# Altium PCB PCB2.PcbDoc
Units mm, origin at the board's own origin, x right, y up, seen from the top; angles counter-clockwise.
Board outline 152.4 x 101.6 mm, 2 copper layers (Top Layer, Bottom Layer); 11 components, 16 nets, 84 pads, 0 vias.
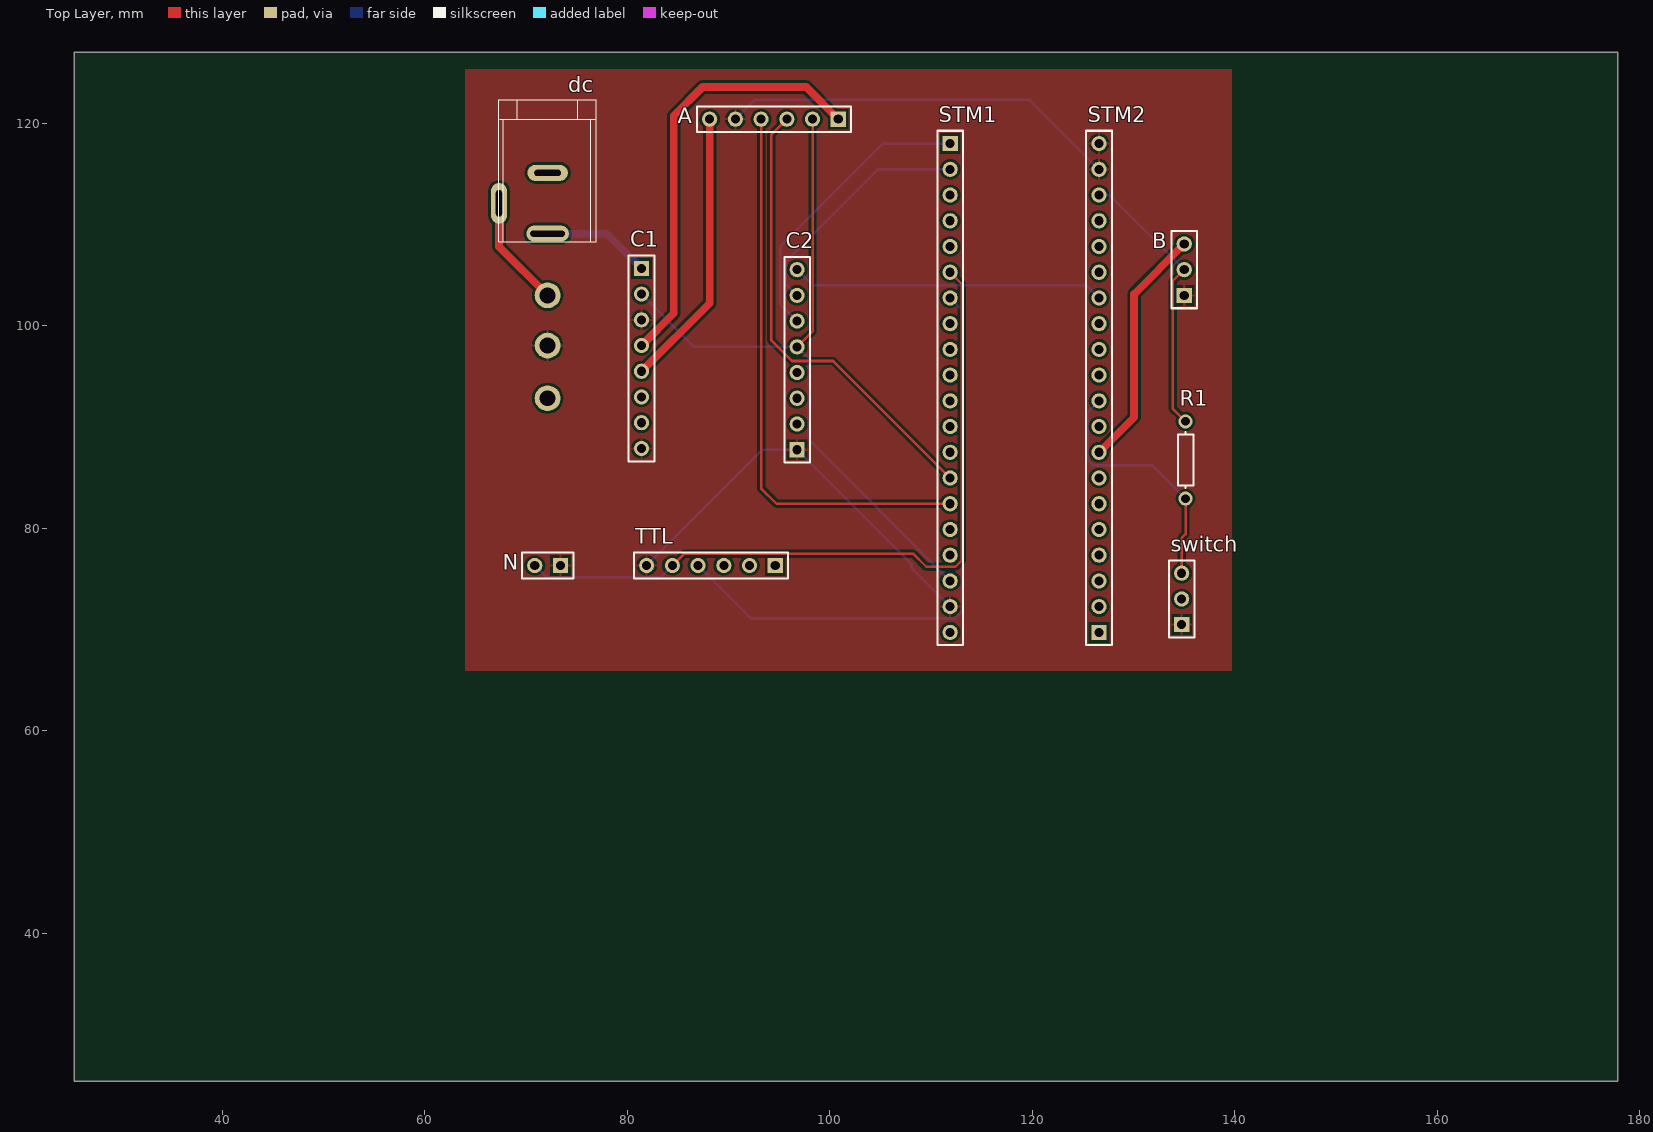
[diagram p0: Top Layer view]
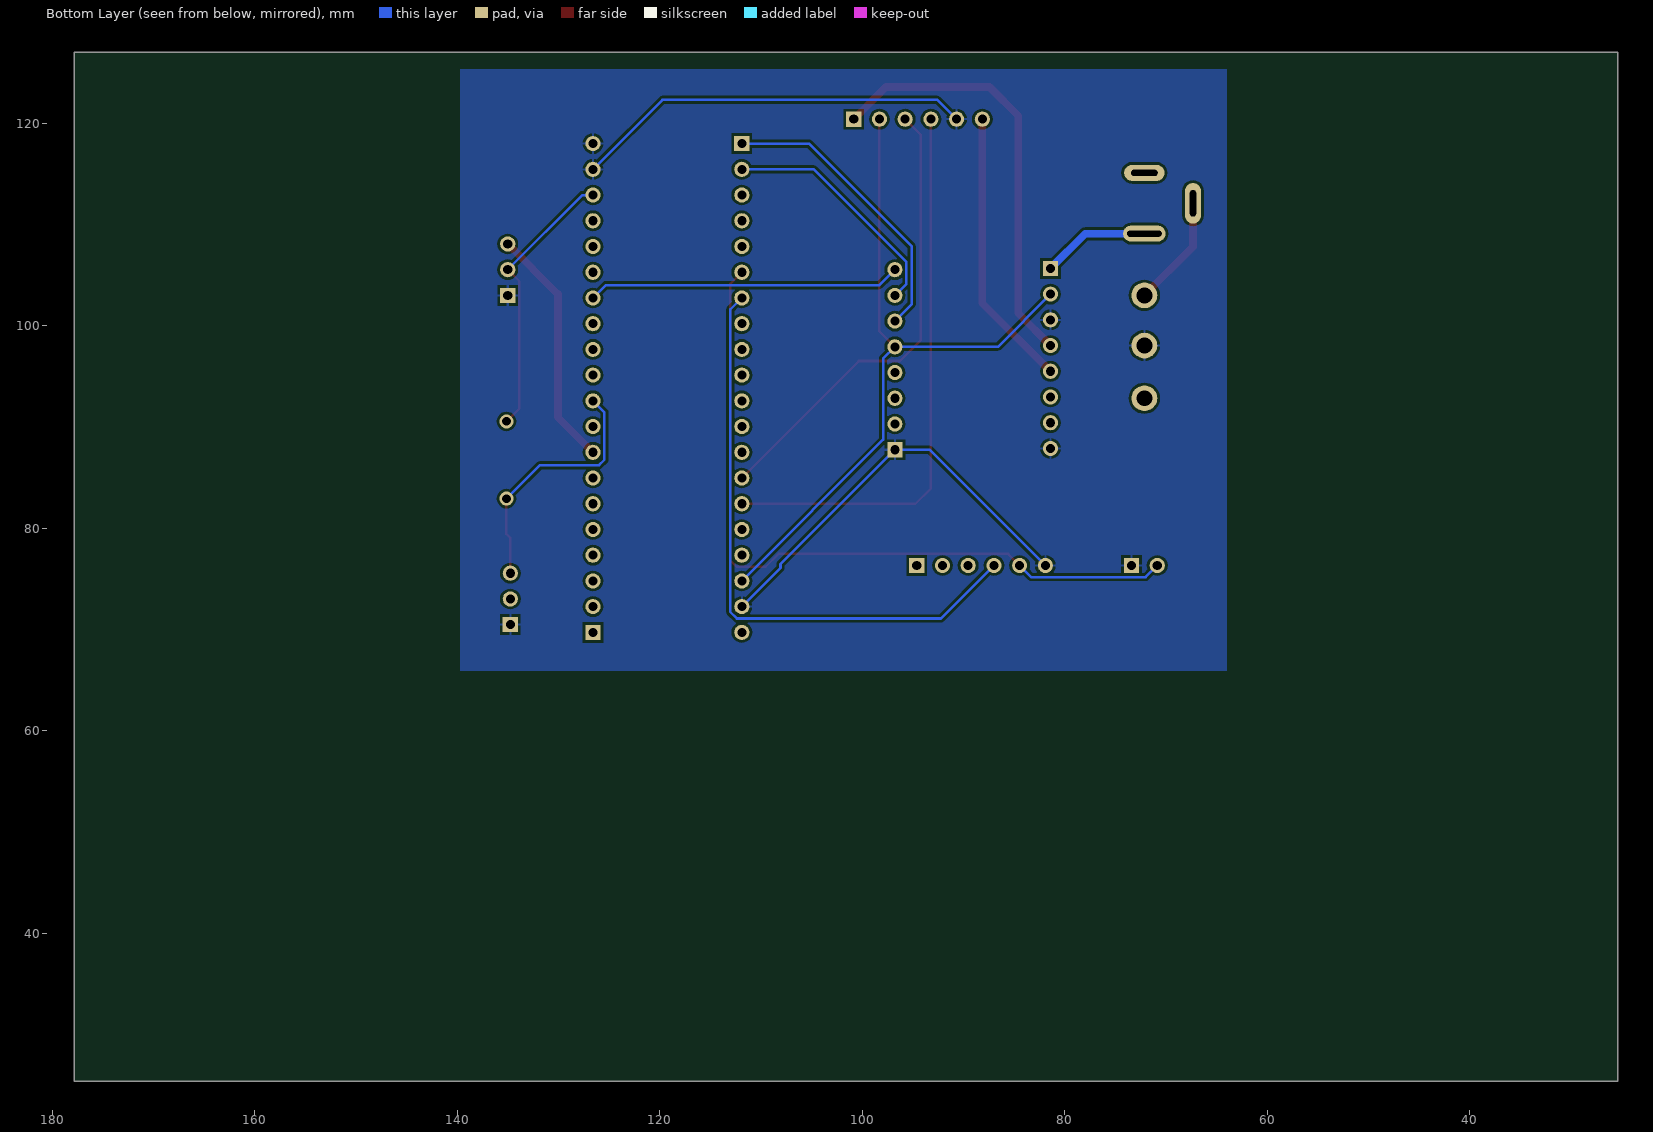
[diagram p1: Bottom Layer view, seen from below]

## Layer stack, top to bottom
Top Solder: solder mask 0.0102, Solder Resist, Dk 3.5
Top Layer: signal copper 0.0356
Dielectric 1: dielectric 0.32, FR-4, Dk 4.8
Bottom Layer: signal copper 0.0356
Bottom Solder: solder mask 0.0102, Solder Resist, Dk 3.5

## Board outline
25.4,25.4 177.8,25.4 177.8,127 25.4,127

## Design rules (kind name [scope] priority, off if disabled: settings)
Clearance [All] p1: gap=0.254 ignorepadtopadclearanceinfootprint=FALSE except(0: Arc-Hole Track-Hole SMDPad-Hole THPad-Hole Via-Hole Fill-Hole Poly-Hole Region-Hole Text-Hole)
PolygonConnect [All] p1: connectstyle=Relief reliefconductorwidth=0.254 reliefentries=4 polygonreliefangle="90 Angle" airgapwidth=0.254
RoomDefinition Sheet2 [InComponentClass('Sheet2')] p1: confinementstyle=ConfineIn formatcopy=TRUE lockcomponents=FALSE outline 64.008,125.349 139.7,125.349 139.7,65.913 64.008,65.913
RoutingVias [All] p1: holewidth=0.711 width=1.27 viastyle="Through Hole" minholewidth=0.711 minwidth=1.27 maxholewidth=0.711 maxwidth=1.27
SolderMaskExpansion [All] p1: expansion=0.102
Width [All] p1: maxlimit=0.254 minlimit=0.254 preferedwidth=0.254
30 further rules are at their usual default settings.

## Components (designator, comment, footprint, x,y, rotation, side; value= is the part's Value field where it differs from the comment)
A "Header 6" HDR1X6 100.838,120.396 r180 top
B "Header 3" HDR1X3 135.001,102.997 r90 top
C1 "Header 8" HDR1X8 81.407,105.664 r270 top
C2 "Header 8" HDR1X8 96.774,87.757 r90 top
dc "Component_1" PCBComponent_1 72.174,115.115 r270 top
N "Header 2" HDR1X2 73.406,76.327 r180 top
R1 "Res1" AXIAL-0.3 135.128,86.741 r90 top value=1K
STM1 "Header 20" HDR1X20 111.887,117.983 r270 top
STM2 "Header 20" HDR1X20 126.587,69.723 r90 top
switch "Header 3" HDR1X3 134.747,70.485 r90 top
TTL "Header 6" HDR1X6 94.615,76.327 r180 top

## Footprints (in the part's own frame and the unit in brackets; to place one, negate y for a bottom-side part, rotate by r counter-clockwise, add the part's x,y. Pads: shape width x height; smd on the part's side, far side on the other; paste and mask are expansions set on the pad)
AXIAL-0.3 [mm] "Axial Device, Thru-Hole; 2 Leads; 0.3 in Pin Spacing"
  round 1.4 hole 0.85: 1(-3.81,0) 2(3.81,0)
  silkscreen extent -2.77,-0.76 2.77,0.76
HDR1X2 [mm] "Connector; Header; 2 Position"
  rect 1.5x1.5 hole 0.9: 1(0,0)
  round 1.5 hole 0.9: 2(2.54,0)
  silkscreen extent -1.27,-1.27 3.81,1.27
HDR1X3 [mm] "Connector; Header; 3 Position"
  rect 1.5x1.5 hole 0.9: 1(0,0)
  round 1.5 hole 0.9: 2(2.54,0) 3(5.08,0)
  silkscreen extent -1.27,-1.27 6.35,1.27
HDR1X6 [mm] "Connector; Header; 6 Position"
  rect 1.5x1.5 hole 0.9: 1(0,0)
  round 1.5 hole 0.9: 2(2.54,0) 3(5.08,0) 4(7.62,0) 5(10.16,0) 6(12.7,0)
  silkscreen extent -1.27,-1.27 13.97,1.27
HDR1X8 [mm] "Connector; Header; 8 Position"
  rect 1.5x1.5 hole 0.9: 1(0,0)
  round 1.5 hole 0.9: 2(2.54,0) 3(5.08,0) 4(7.62,0) 5(10.16,0) 6(12.7,0) 7(15.24,0) 8(17.78,0)
  silkscreen extent -1.27,-1.27 19.05,1.27
HDR1X20 [mm] "Connector; Header; 20 Position"
  rect 1.5x1.5 hole 0.9: 1(0,0)
  round 1.5 hole 0.9: 2(2.54,0) 3(5.08,0) 4(7.62,0) 5(10.16,0) 6(12.7,0) 7(15.24,0) 8(17.78,0) 9(20.32,0) 10(22.86,0) 11(25.4,0) 12(27.94,0) 13(30.48,0) 14(33.02,0) 15(35.56,0) 16(38.1,0) 17(40.64,0) 18(43.18,0) 19(45.72,0) 20(48.26,0)
  silkscreen extent -1.27,-1.27 49.53,1.27
PCBComponent_1 [mm]
  oval 1.6x4 hole 0.6 slot 2.6 at 90 deg: 1(0.022,-0.038)
  oval 4x1.6 hole 0.6 slot 2.6 at 0 deg: 2(3.022,-4.838)
  oval 1.6x4.2 hole 0.6 slot 3.4 at 90 deg: 3(6.022,-0.038)
  silkscreen extent -7.18,-4.84 6.82,4.76

## Part data
A TTL: "Header, 6-Pin", LatestRevisionDate=17-Jul-2002, LatestRevisionNote="Re-released for DXP Platform.", Publisher="Altium Limited"
B switch: "Header, 3-Pin", LatestRevisionDate=17-Jul-2002, LatestRevisionNote="Re-released for DXP Platform.", Publisher="Altium Limited"
C1 C2: "Header, 8-Pin", LatestRevisionDate=17-Jul-2002, LatestRevisionNote="Re-released for DXP Platform.", Publisher="Altium Limited"
N: "Header, 2-Pin", LatestRevisionDate=17-Jul-2002, LatestRevisionNote="Re-released for DXP Platform.", Publisher="Altium Limited"
R1: "Resistor", LatestRevisionDate=17-Jul-2002, LatestRevisionNote="Re-released for DXP Platform.", PackageDescription="Axial Device, Thru-Hole; 2 Leads; 0.3 in Pin Spacing", PackageReference=AXIAL-0.3, Published=8-Jun-2000, Publisher="Altium Limited"
STM1 STM2: "Header, 20-Pin", LatestRevisionDate=17-Jul-2002, LatestRevisionNote="Re-released for DXP Platform.", Publisher="Altium Limited"

## Free pads (board coordinates)
  round 2.54 hole 1.562: 3(72.136,102.997) 4(72.136,98.044) 5(72.136,92.837)

## Nets (pads, with @x,y where several pads share a name; then routed paths per layer and width w, separated by ;. In a path a pad name is that pad's centre, name@x,y a point inside that pad or via, vN(x,y) a via of type N, cw(c..) or ccw(c..) an arc to the next point about the centre after c; other vN are vias at no path point)
NetA_1: A.1 C1.4 | length 42.7
  Top Layer w0.762: C1.4 84.582,101.219 84.582,120.726 87.427,123.571 97.663,123.571 A.1
NetA_2: A.2 C1.2 C2.5 STM1.18 | length 70
  Top Layer w0.254: C2.5 98.298,99.441 A.2
  Bottom Layer w0.254: C1.2 86.614,97.917 C2.5 97.942,96.749 97.942,88.748 STM1.18
NetA_3: A.3 STM1.14 | length 45.8
  Top Layer w0.254: A.3 94.234,118.872 94.234,98.552 96.266,96.52 100.33,96.52 STM1.14
NetA_4: A.4 STM1.15 | length 55.7
  Top Layer w0.254: A.4 93.218,83.947 94.742,82.423 STM1.15
NetA_5: A.5 B.1 C1.3 C1.8 C2.1 N.1 pad.4 STM1.19 STM2.19 STM2.20 switch.1 TTL.6 | length 80.9
  Bottom Layer w0.254: TTL.6 93.345,87.757 C2.1 108.066,76.465 108.066,76.084 STM1.19 ; A.5 92.583,122.301 119.729,122.301 STM2.19
NetA_6: A.6 C1.5 | length 27.7
  Top Layer w0.762: C1.5 88.138,102.235 A.6
NetB_2: B.2 R1.2 STM2.18 | length 27.5
  Top Layer w0.254: B.2 133.858,104.394 133.858,91.821 R1.2
  Bottom Layer w0.254: STM2.18 127.635,112.903 B.2
NetB_3: B.3 STM2.8 | length 24.1
  Top Layer w0.762: STM2.8 130.048,90.964 130.048,103.124 B.3
NetC1_1: C1.1 dc.3 | length 10.7
  Bottom Layer w0.762: dc.3 77.978,109.093 C1.1
NetC2_6: C2.6 STM1.1 | length 29.1
  Bottom Layer w0.254: C2.6 95.098,102.133 95.098,107.823 105.258,117.983 STM1.1
NetC2_7: C2.7 STM1.2 | length 23.8
  Bottom Layer w0.254: C2.7 95.631,104.14 95.631,106.299 104.775,115.443 STM1.2
NetC2_8: C2.8 STM2.14 | length 31
  Bottom Layer w0.254: C2.8 98.298,104.013 125.317,104.013 STM2.14
Netdc_2: dc.2 pad.3 | length 11.1
  Top Layer w0.762: dc.2 67.336,107.797 pad.3
NetN_2: N.2 STM1.6 TTL.5 | length 73.3
  Top Layer w0.254: TTL.5 85.598,77.47 108.255,77.47 109.525,76.2 112.395,76.2 113.03,76.835 113.03,104.14 STM1.6
  Bottom Layer w0.254: N.2 72.009,75.184 83.312,75.184 TTL.5
NetR1_1: R1.1 STM2.10 switch.3 | length 25.1
  Top Layer w0.254: switch.3 134.747,79.045 135.128,79.426 R1.1
  Bottom Layer w0.254: STM2.10 125.451,91.447 125.451,86.766 125.984,86.233 131.826,86.233 R1.1
NetSTM1_7: STM1.7 TTL.4 | length 59.9
  Bottom Layer w0.254: TTL.4 92.227,71.095 112.37,71.095 113.03,71.755 113.03,101.6 STM1.7
pads on no net: C1.6 C1.7 C2.2 C2.3 C2.4 dc.1 STM1.3 STM1.4 STM1.5 STM1.8 STM1.9 STM1.10 STM1.11 STM1.12 STM1.13 STM1.16 STM1.17 STM1.20 STM2.1 STM2.2 STM2.3 STM2.4 STM2.5 STM2.6 STM2.7 STM2.9 STM2.11 STM2.12 STM2.13 STM2.15 STM2.16 STM2.17 switch.2 TTL.1 TTL.2 TTL.3

## Polygon pours and split planes (outlines as drawn)
NetA_5 on Top Layer "Top Layer-No Net" (solid, pour order 0): 64.008,125.349 139.7,125.349 139.7,65.913 64.008,65.913
NetA_5 on Bottom Layer "Bottom Layer-No Net" (solid, pour order 2): 64.008,125.349 139.7,125.349 139.7,65.913 64.008,65.913